# Altium PCB PCB.PcbDoc
Units mm, origin at the board's own origin, x right, y up, seen from the top; angles counter-clockwise.
Board outline 72.52 x 60.74 mm, 2 copper layers (Top Layer, Bottom Layer); 52 components, 46 nets, 260 pads, 31 vias.
Unrouted connection lines stored in the file: 1.
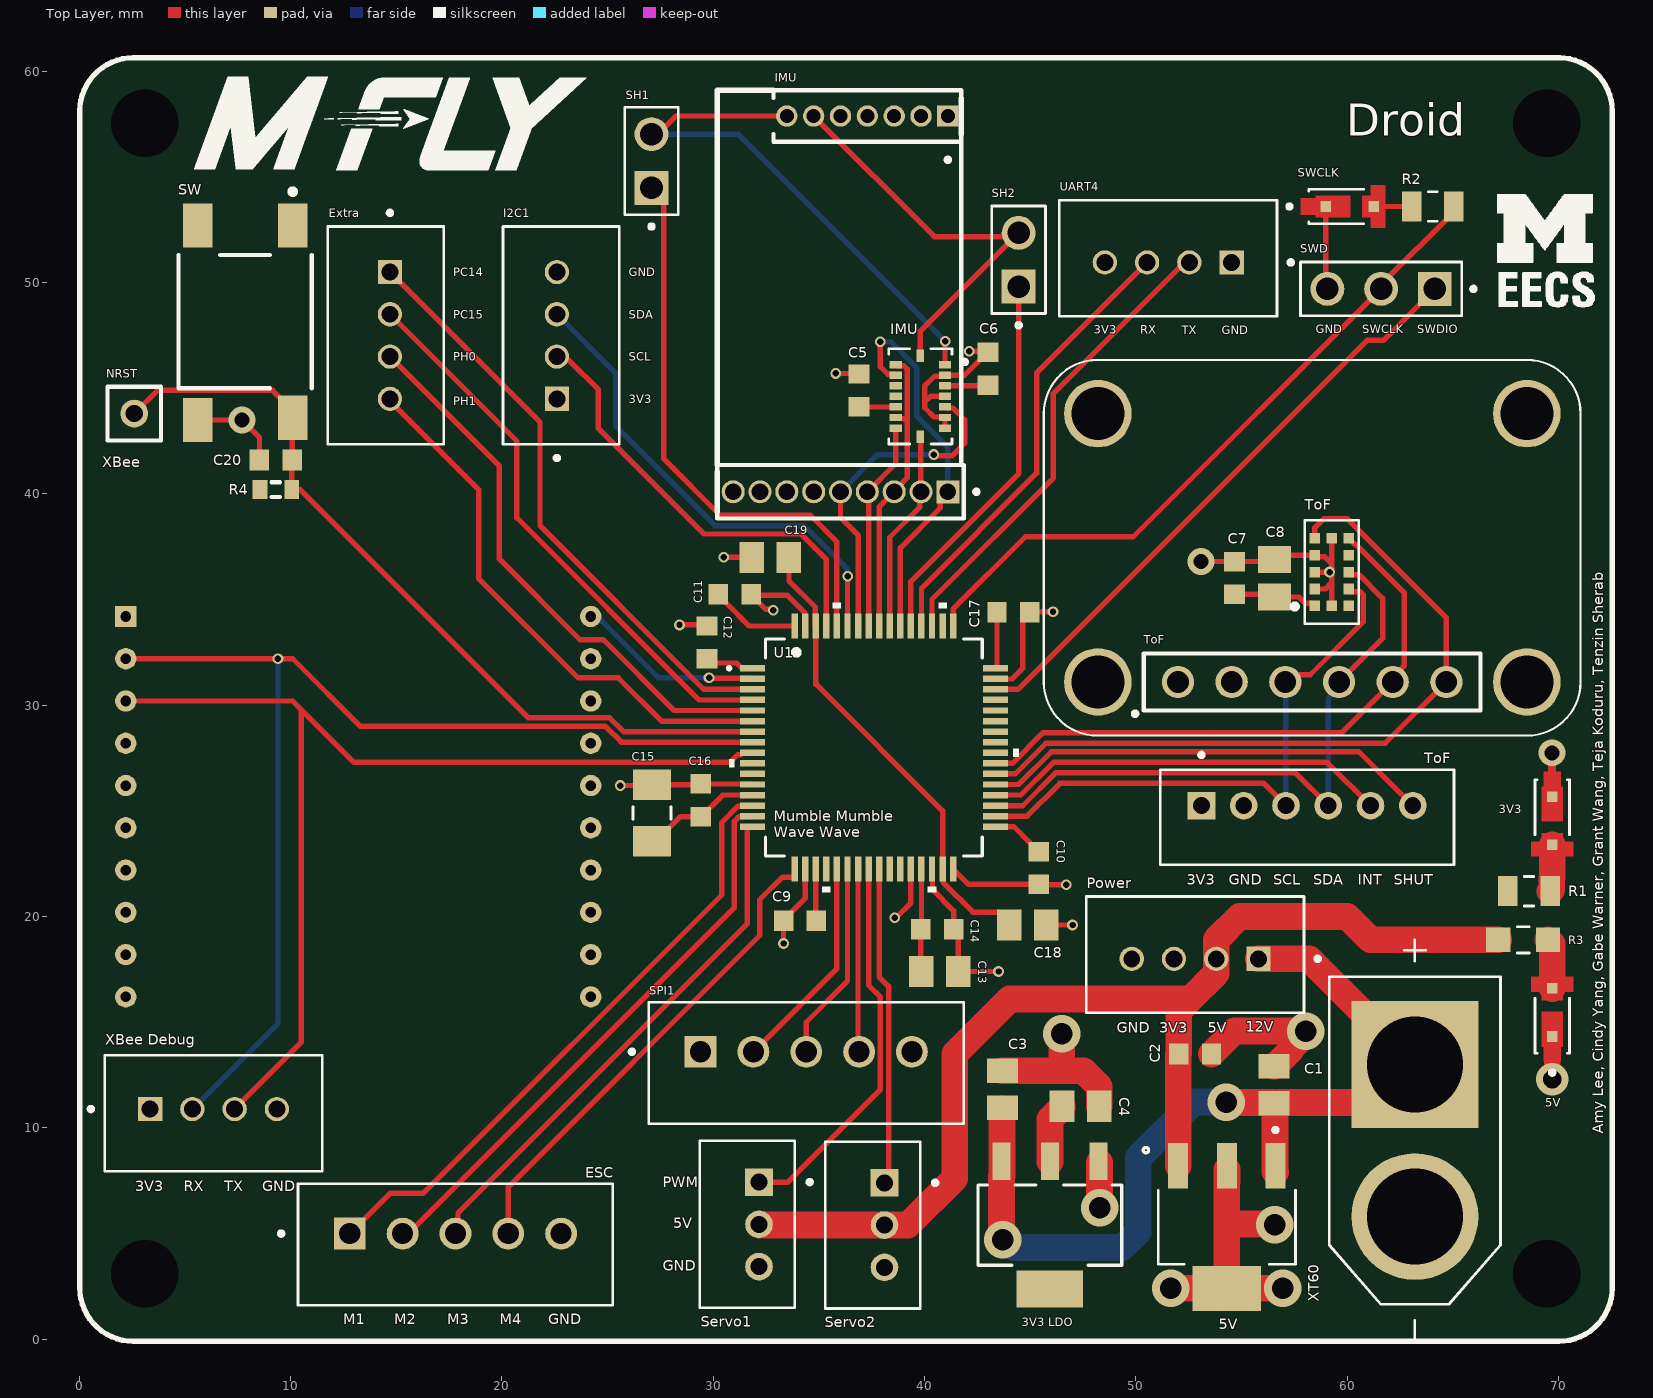
[diagram p0: Top Layer view]
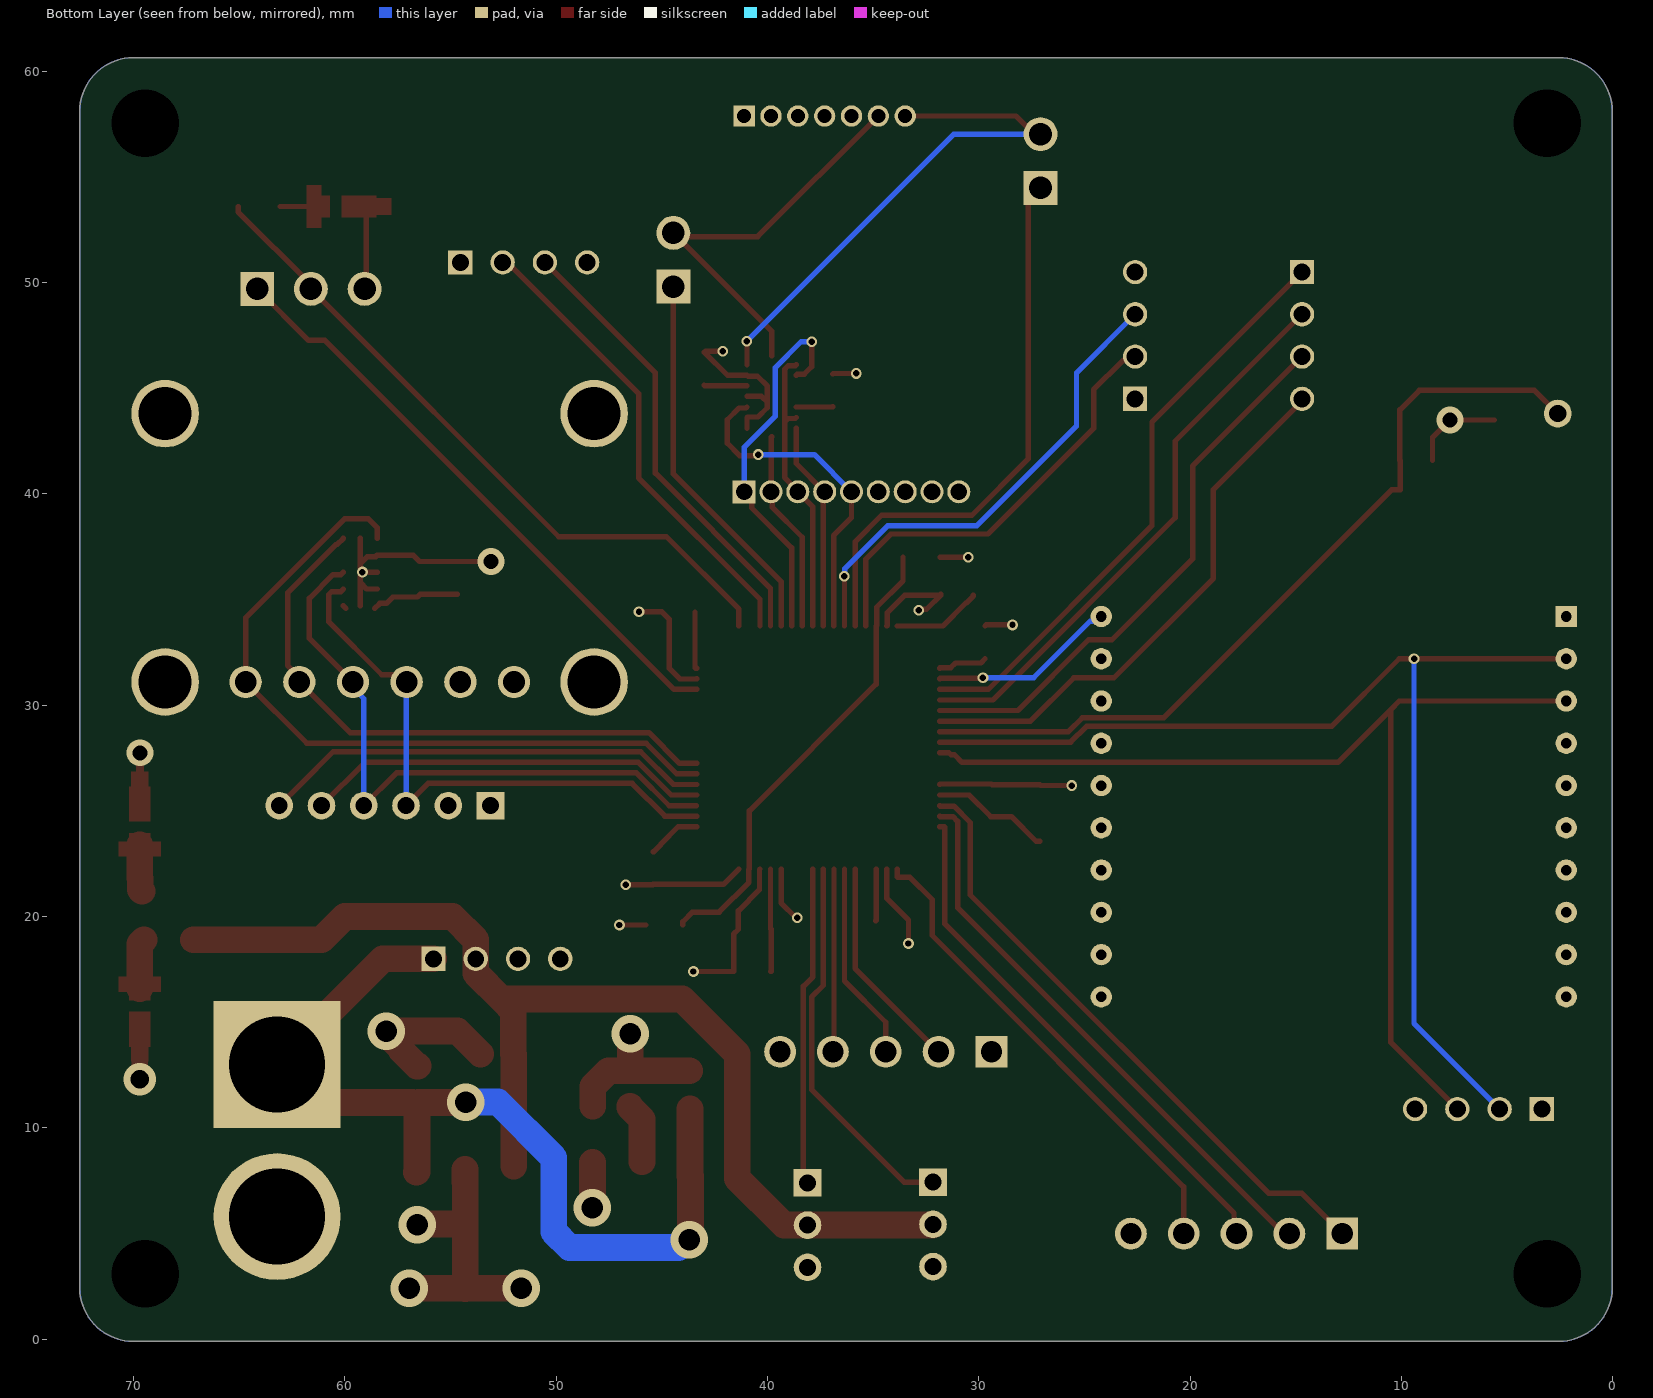
[diagram p1: Bottom Layer view, seen from below]
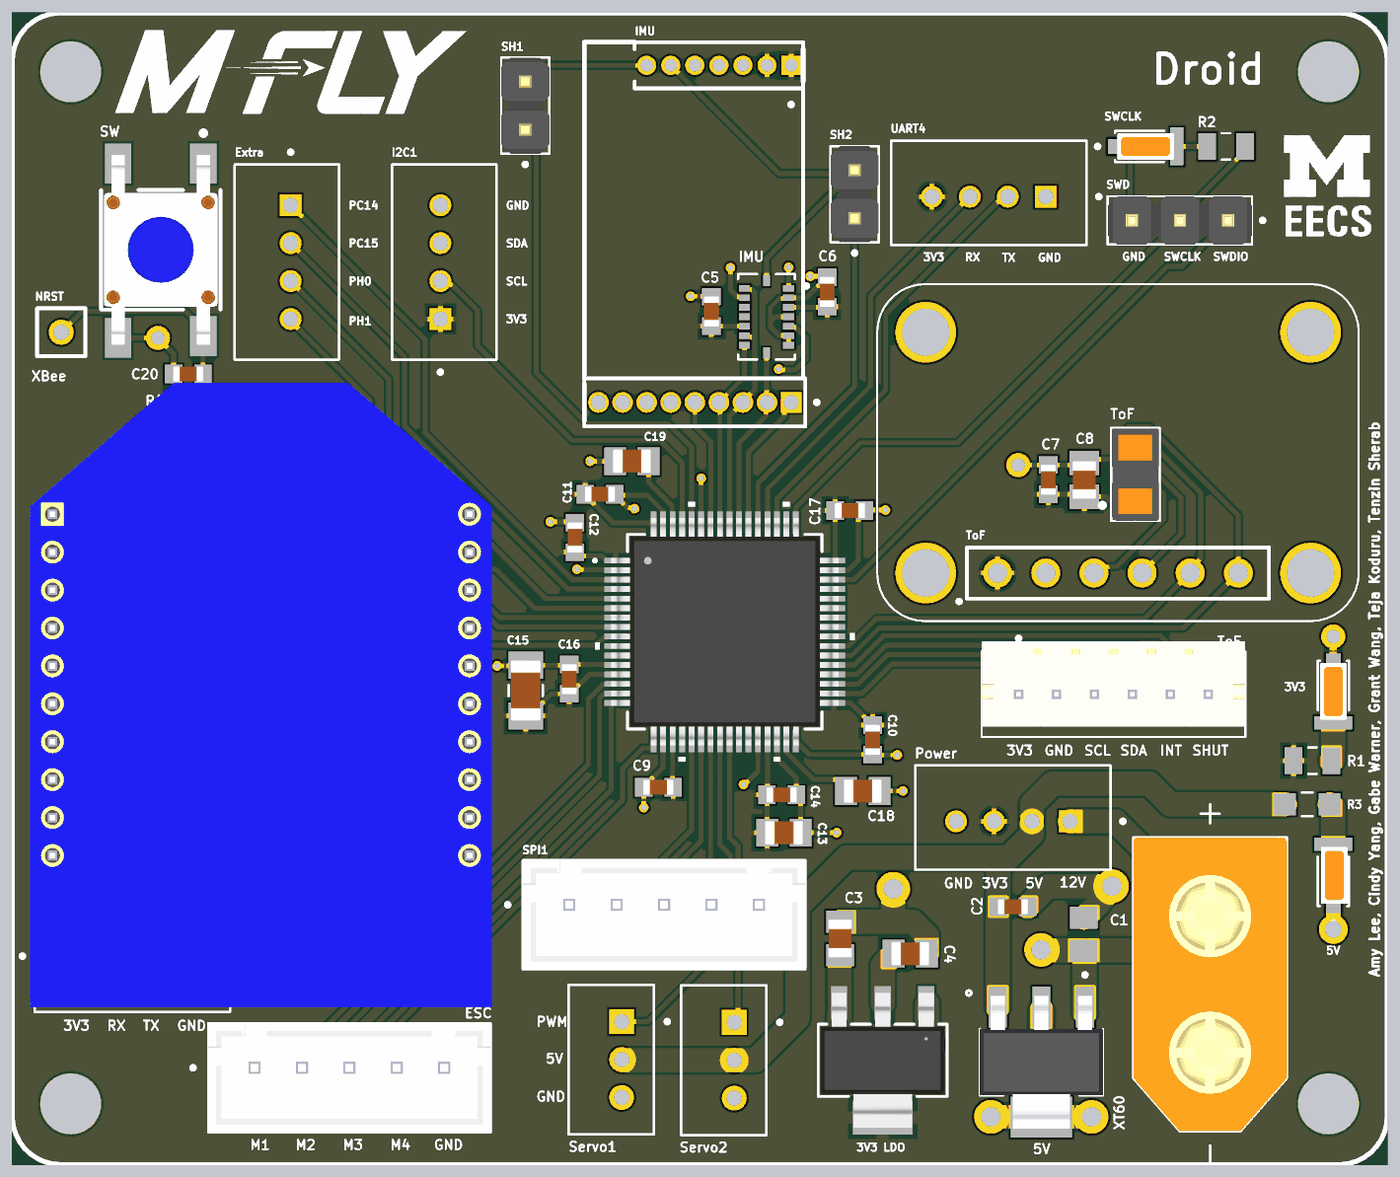
[diagram p2: 3D render of the assembled board from above, using the file's embedded part models]

## Layer stack, top to bottom
Top Solder: solder mask 0.0102, Solder Resist, Dk 3.5
Top Layer: signal copper 0.0356
Dielectric 1: dielectric 0.32, FR-4, Dk 4.8
Bottom Layer: signal copper 0.0356
Bottom Solder: solder mask 0.0102, Solder Resist, Dk 3.5

## Board outline
0.02,2.44 0.02,58.2 0.02,58.1 cw(c2.56,58.1) 2.56,60.64 70,60.64 cw(c70,58.1) 72.54,58.1 72.54,2.34 72.54,2.44 cw(c70,2.44) 70,-0.1 2.56,-0.1 cw(c2.56,2.44)

## Design rules (kind name [scope] priority, off if disabled: settings)
Clearance [All] p1: gap=0.127 ignorepadtopadclearanceinfootprint=FALSE
PolygonConnect PolygonConnect_2 [(InNet('3V3') AND InComponent('3V3 LDO'))] p1: connectstyle=Relief reliefconductorwidth=0.635 reliefentries=4 polygonreliefangle="90 Angle" airgapwidth=0.254
PolygonConnect [All] p2: connectstyle=Relief reliefconductorwidth=0.254 reliefentries=4 polygonreliefangle="90 Angle" airgapwidth=0.254
RoutingVias [All] p1: holewidth=0.711 width=1.27 viastyle="Through Hole" minholewidth=0.711 minwidth=1.27 maxholewidth=0.711 maxwidth=1.27
SolderMaskExpansion [All] p1: expansion=0.102 istentingtop=FALSE
SupplyNets "Schematic Supply Nets_4" [InNet('V11')] p1: voltage=0.000
SupplyNets "Schematic Supply Nets_3" [InNet('+5')] p2: voltage=0.000
SupplyNets "Schematic Supply Nets_2" [InNet('GND')] p3: voltage=0.000
SupplyNets "Schematic Supply Nets_1" [InNet('+12')] p4: voltage=0.000
SupplyNets "Schematic Supply Nets" [InNet('3V3')] p5: voltage=0.000
Width [All] p1: maxlimit=2.54 minlimit=0.254 preferedwidth=0.254 minimp=50.000000 maximp=50.000000 favimp=50.000000
30 further rules are at their usual default settings.

## Classes and differential pairs
component class STM32: 5V C1 C2 C3 C4 C9 C10 C11 C12 C13 C14 C15 C16 C17 C18 C19 C20 NRST R1 R2 R3 R4 SW SWCLK U1 XT60
component class Schematic: C5 C6 C7 C8 ESC Extra I2C1 IMU Power Servo1 Servo2 SPI1 ToF UART4 XBee "XBee Debug"

## Components (designator, comment, footprint, x,y, rotation, side; value= is the part's Value field where it differs from the comment)
3V3 "LED" LED_MP-3014-1100-50-70 69.7,24.85 r90 top (schematic designator D2)
"3V3 LDO" "LM1117MPX-33NOPB" SOT-223_DIO 45.928,5.397 r180 top (schematic designator U2)
5V "LED" LED_MP-3014-1100-50-70 69.7,15.15 r270 top (schematic designator D3)
5V "LM7805MP/NOPB" VREG_LM7805MP/NOPB 54.3,5.3 r270 top (schematic designator VR1)
C1 "220nF" CAPC2012X88N 56.533,12.046 r270 top
C2 "100nF" CAPC1608X90N 52.8,13.5 r180 top
C3 "10uF" CAPC2012X152N 43.681,11.824 r270 top
C4 "10uF" CAPC2012X152N 47.381,11.024 r180 top
C5 "100nF" CAPC1608X90N 36.9,44.9 r270 top
C6 "100nF" CAPC1608X90N 43,45.925 r270 top
C7 "100nF" CAPC1608X90N 54.663,36.025 r270 top
C8 "4.7uF" CAPC2012X145N 56.563,36.011 r270 top
C9 "100nF" CAPC1608X90N 34.1,19.8 r0 top
C10 "100nF" CAPC1608X90N 45.4,22.3 r90 top
C11 "100nF" CAPC1608X90N 31.013,35.255 r180 top
C12 "100nF" CAPC1608X90N 29.7,32.975 r270 top
C13 "10uF" CAPC2012X152N 40.72,17.4 r180 top
C14 "100nF" CAPC1608X90N 40.6,19.4 r180 top
C15 "1uF" CAPC3216X180N 27.1,24.9 r270 top
C16 "100nF" CAPC1608X90N 29.4,25.5 r270 top
C17 "100nF" CAPC1608X90N 44.2,34.4 r180 top
C18 "2.2uF" CAPC2012X152N 44.88,19.6 r180 top
C19 "2.2uF" CAPC2012X152N 32.7,37 r0 top
C20 "100nF" CAPC1608X90N 9.3,41.6 r0 top
ESC "B5B-XH-A" JST_B5B-XH-A 17.8,4.475 r180 top (schematic designator J1)
Extra "35362-0450" MOLEX_35362-0450 14.7,47.5 r270 top (schematic designator J13)
I2C1 "35362-0450" MOLEX_35362-0450 22.6,47.5 r90 top (schematic designator J11)
IMU "TMS-107-54-G-S" SAMTEC_TMS-107-54-G-S 37.29,57.88 r180 top (schematic designator J9)
IMU "BMI088" PQFN50P450X300X100-16N 39.8,44.615 r270 top (schematic designator U4)
J10 "SLM-109-01-T-S" SAMTEC_SLM-109-01-T-S 36.02,40.1 r180 top
NRST "TS-101-X-A-1" SAMTEC_TS-101-X-A-1 2.6,43.8 r0 top (schematic designator J15)
Power "35362-0450" MOLEX_35362-0450 52.8,18 r180 top (schematic designator J8)
R1 "91ohm" RESC2012X50N 68.6,21.2 r180 top
R2 "91ohm" RESC2012X50N 64.045,53.6 r0 top
R3 "430ohm" RES_ERJ-6GEYJ431V 68.325,18.9 r180 top
R4 "Res3" J1-0603 9.3,40.2 r0 top value=10K
Servo1 "B3B-PH-K-S" JST_B3B-PH-K-S 31.611,5.436 r90 top (schematic designator J2)
Servo2 "B3B-PH-K-S" JST_B3B-PH-K-S 37.55,5.4 r90 top (schematic designator J3)
SH1 "M20-9990245" HARWIN_M20-9990245 27.076,55.753 r90 top
SH2 "M20-9990245" HARWIN_M20-9990245 44.45,51.079 r90 top
SPI1 "B5B-XH-A" JST_B5B-XH-A 34.4,13.075 r180 top (schematic designator J12)
SW "" FP-2-1977223-2-MFG 7.85,48.15 r0 top
SWCLK "" LED_MP-3014-1100-50-70 59.8,53.6 r180 top (schematic designator D1)
SWD "M20-9990345" HARWIN_M20-9990345 61.6,49.7 r180 top (schematic designator J9)
ToF "" 61300611821 58.34,31.1 r0 top (schematic designator J?)
ToF "VL53L1CXV0FY/1" SENSOR_VL53L1CXV0FY/1 59.263,36.3 r180 top (schematic designator U6)
ToF "B6B-PH-K" JST_B6B-PH-K 58.1,24.7 r180 top (schematic designator J6)
U1 "STM32U545RET6Q" LQFP64-10x10mm_STM 37.6,28 r0 top
UART4 "35362-0450" MOLEX_35362-0450 51.527,50.952 r180 top (schematic designator J14)
XBee "XB24-Z7WIT-004" DIP-20 0.946,8.191 r0 top (schematic designator XBEE)
"XBee Debug" "35362-0450" MOLEX_35362-0450 6.351,10.892 r0 top (schematic designator J7)
XT60 "XT60-M" AMASS_XT60-M 63.2,9.4 r270 top (schematic designator J5)

## Footprints (in the part's own frame and the unit in brackets; to place one, negate y for a bottom-side part, rotate by r counter-clockwise, add the part's x,y. Pads: shape width x height; smd on the part's side, far side on the other; paste and mask are expansions set on the pad)
61300611821 [mm]
  round 1.53 hole 1.02: 1(-6.35,0) 2(-3.81,0) 3(-1.27,0) 4(1.27,0) 5(3.81,0) 6(6.35,0)
  silkscreen extent -8.48,-1.6 7.97,1.35
AMASS_XT60-M [mm]
  round 6 hole 4.55: N(3.6,0)
  rect 6x6 / inner round 6 / far side rect 6x6 hole 4.55: P(-3.6,0)
  silkscreen extent -9.5,-4.05 9.5,4.05, body extent -7.75,-4.05 7.75,4.05, height 16
CAPC1608X90N [mm]
  rect 0.92x0.98 smd: 1(-0.775,0) 2(0.775,0)
  body extent -0.8,-0.41 0.8,0.41, height 0.9
CAPC2012X88N [mm]
  rect 1.16x1.47 smd: 1(-0.875,0) 2(0.875,0)
CAPC2012X145N [mm]
  rect 1.28x1.56 smd: 1(-0.889,0) 2(0.889,0)
  body extent -1,-0.63 1,0.63, height 1.45
CAPC2012X152N [mm]
  rect 1.16x1.47 smd: 1(-0.88,0) 2(0.88,0)
  body extent -1,-0.63 1,0.63, height 1.52
CAPC3216X180N [mm]
  rect 1.44x1.82 smd: 1(-1.336,0) 2(1.336,0)
  silkscreen extent -0.29,-0.9 0.29,0.9, body extent -1.6,-0.8 1.6,0.8, height 1.8
DIP-20 [mm]
  rect 1.008x1.008 / inner round 1.008 / far side rect 1.008x1.008 hole 0.5: 1(1.254,26.009)
  round 1.008 hole 0.5: 2(1.254,24.009) 3(1.254,22.009) 4(1.254,20.009) 5(1.254,18.009) 6(1.254,16.009) 7(1.254,14.009) 8(1.254,12.009) 9(1.254,10.009) 10(1.254,8.009) 11(23.254,8.009) 12(23.254,10.009) 13(23.254,12.009) 14(23.254,14.009) 15(23.254,16.009) 16(23.254,18.009) 17(23.254,20.009) 18(23.254,22.009) 19(23.254,24.009) 20(23.254,26.009)
  body extent 0,0 24.38,32.94, height 4.6
FP-2-1977223-2-MFG [mm]
  rect 1.4x2.1 smd paste+0 mask+0: 1(2.25,4.55) 2(2.25,-4.55) 3(-2.25,4.55) 4(-2.25,-4.65)
  silkscreen extent -3.15,-3.15 3.15,6.27, body extent -3.25,-5.8 3.25,5.7, height 0.25
HARWIN_M20-9990245 [mm]
  rect 1.605x1.605 / inner round 1.605 / far side rect 1.605x1.605 hole 1.07: 1(-1.27,0)
  round 1.605 hole 1.07: 2(1.27,0)
  silkscreen extent -3.2,-1.27 2.54,1.27, body extent -2.54,-1.27 2.54,1.27, height 8.74
HARWIN_M20-9990345 [mm]
  rect 1.605x1.605 / inner round 1.605 / far side rect 1.605x1.605 hole 1.07: 1(-2.54,0)
  round 1.605 hole 1.07: 2(0,0) 3(2.54,0)
  silkscreen extent -4.47,-1.27 3.81,1.27, body extent -3.82,-1.27 3.8,1.27, height 7.37
J1-0603 [mm] "Chip Resistor, Body 1.6x0.8mm, IPC High Density"
  rect 0.7x0.9 smd: 1(-0.75,0) 2(0.75,0)
  silkscreen extent -0.2,-0.35 0.2,0.35, body extent -0.85,-0.48 0.85,0.48, height 0.9
JST_B3B-PH-K-S [mm]
  rect 1.308x1.308 / inner round 1.308 / far side rect 1.308x1.308 hole 0.8: 1(2,-0.55)
  round 1.308 hole 0.8: 2(0,-0.55) 3(-2,-0.55)
  silkscreen extent -3.95,-3.05 3.95,2.25
JST_B5B-XH-A [mm]
  rect 1.508x1.508 / inner round 1.508 / far side rect 1.508x1.508 hole 1: 1(5,-0.525)
  round 1.508 hole 1: 2(2.5,-0.525) 3(0,-0.525) 4(-2.5,-0.525) 5(-5,-0.525)
  silkscreen extent -7.45,-2.88 8.35,2.88, body extent -7.45,-2.88 7.45,2.88, height 7
JST_B6B-PH-K [mm]
  rect 1.308x1.308 / inner round 1.308 / far side rect 1.308x1.308 hole 0.8: 1(5,-0.55)
  round 1.308 hole 0.8: 2(3,-0.55) 3(1,-0.55) 4(-1,-0.55) 5(-3,-0.55) 6(-5,-0.55)
  silkscreen extent -6.95,-3.05 6.95,2.25, body extent -6.95,-2.8 6.95,1.7, height 6
LED_MP-3014-1100-50-70 [mm]
  rect 0.5x0.5 smd paste-1 mask+0: A(-1.45,0) C(0.825,0)
  Top Layer region: 1.3,0.4 2,0.4 2,-0.4 1.3,-0.4 1.3,-0.5 -0.35,-0.5 -0.35,0.5 1.3,0.5
  Top Layer region: -1.3,0.5 -0.9,0.5 -0.9,-0.5 -1.3,-0.5 -1.3,-1 -2,-1 -2,1 -1.3,1
  silkscreen extent -0.98,-0.82 1.62,0.82, body extent -1.5,-0.7 1.5,0.7, height 0.52
LQFP64-10x10mm_STM [mil]
  rect 47x12 smd paste+0 mask+0: 1(-226.38,147.64) 2(-226.38,127.95) 3(-226.38,108.27) 4(-226.38,88.58) 5(-226.38,68.9) 6(-226.38,49.21) 7(-226.38,29.53) 8(-226.38,9.84) 9(-226.38,-9.84) 10(-226.38,-29.53) 11(-226.38,-49.21) 12(-226.38,-68.9) 13(-226.38,-88.58) 14(-226.38,-108.27) 15(-226.38,-127.95) 16(-226.38,-147.64) 33(226.38,-147.64) 34(226.38,-127.95) 35(226.38,-108.27) 36(226.38,-88.58) 37(226.38,-68.9) 38(226.38,-49.21) 39(226.38,-29.53) 40(226.38,-9.84) 41(226.38,9.84) 42(226.38,29.53) 43(226.38,49.21) 44(226.38,68.9) 45(226.38,88.58) 46(226.38,108.27) 47(226.38,127.95) 48(226.38,147.64)
  rect 12x47 smd paste+0 mask+0: 17(-147.64,-226.38) 18(-127.95,-226.38) 19(-108.27,-226.38) 20(-88.58,-226.38) 21(-68.9,-226.38) 22(-49.21,-226.38) 23(-29.53,-226.38) 24(-9.84,-226.38) 25(9.84,-226.38) 26(29.53,-226.38) 27(49.21,-226.38) 28(68.9,-226.38) 29(88.58,-226.38) 30(108.27,-226.38) 31(127.95,-226.38) 32(147.64,-226.38) 49(147.64,226.38) 50(127.95,226.38) 51(108.27,226.38) 52(88.58,226.38) 53(68.9,226.38) 54(49.21,226.38) 55(29.53,226.38) 56(9.84,226.38) 57(-9.84,226.38) 58(-29.53,226.38) 59(-49.21,226.38) 60(-68.9,226.38) 61(-88.58,226.38) 62(-108.27,226.38) 63(-127.95,226.38) 64(-147.64,226.38)
  silkscreen extent -273,-270 270,270, body extent -236,-236 236,236, height 63
MOLEX_35362-0450 [mm]
  rect 1.15x1.15 / inner round 1.15 / far side rect 1.15x1.15 hole 0.8: 01(-3,0)
  round 1.15 hole 0.8: 02(-1,0) 03(1,0) 04(3,0)
  silkscreen extent -5.9,-2.95 5.15,2.55
PQFN50P450X300X100-16N [mm]
  rect 0.35x0.59 smd: 1(-1.5,1.165) 2(-1,1.165) 3(-0.5,1.165) 4(0,1.165) 5(0.5,1.165) 6(1,1.165) 7(1.5,1.165) 9(1.5,-1.165) 10(1,-1.165) 11(0.5,-1.165) 12(0,-1.165) 13(-0.5,-1.165) 14(-1,-1.165) 15(-1.5,-1.165)
  rect 0.59x0.35 smd: 8(1.915,0) 16(-1.915,0)
  silkscreen extent -2.25,-1.5 2.25,2.2
RES_ERJ-6GEYJ431V [mm]
  rect 1.15x1.15 smd: 1(-1.175,0) 2(1.175,0)
  silkscreen extent -0.28,-0.63 0.28,0.63
RESC2012X50N [mm]
  rect 0.92x1.42 smd: 1(-1,0) 2(1,0)
  silkscreen extent -0.22,-0.7 0.22,0.7
SAMTEC_SLM-109-01-T-S [mm]
  rect 1.087x1.087 hole 0.787: 01(-5.08,0)
  round 1.087 hole 0.787: 02(-3.81,0) 03(-2.54,0) 04(-1.27,0) 05(0,0) 06(1.27,0) 07(2.54,0) 08(3.81,0) 09(5.08,0)
  silkscreen extent -6.53,-1.27 5.83,1.27
SAMTEC_TMS-107-54-G-S [mm]
  rect 1.01x1.01 hole 0.66: 01(-3.81,0)
  round 1.01 hole 0.66: 02(-2.54,0) 03(-1.27,0) 04(0,0) 05(1.27,0) 06(2.54,0) 07(3.81,0)
  silkscreen extent -4.44,-1.22 4.44,2.17
SAMTEC_TS-101-X-A-1 [mil]
  round 52 hole 32: 01(0,0)
  silkscreen extent -50,-50 50,50
SENSOR_VL53L1CXV0FY/1 [mm]
  rect 0.5x0.5 smd: 1(0.8,1.6) 2(0.8,0.8) 3(0.8,0) 4(0.8,-0.8) 5(0.8,-1.6) 6(0,-1.6) 7(-0.8,-1.6) 8(-0.8,-0.8) 9(-0.8,0) 10(-0.8,0.8) 11(-0.8,1.6) 12(0,1.6)
  silkscreen extent -1.28,-2.45 1.87,2.45, body extent -1.25,-2.45 1.25,2.45, height 1.6
SOT-223_DIO [mm]
  rect 0.851x1.761 smd paste+0 mask+0: 1(-2.3,-3.025) 2(0,-3.025) 3(2.3,-3.025)
  rect 3.151x1.761 smd paste+0 mask+0: 4(0,3.025)
  silkscreen extent -4.67,-3.68 3.4,1.9, body extent -3.27,-3.55 3.27,3.55, height 1.65
VREG_LM7805MP/NOPB [mm]
  rect 2.15x0.95 smd: 1(-2.9,2.3) 2(-2.9,0) 3(-2.9,-2.3)
  rect 2.15x3.25 smd: 4(2.9,0)
  silkscreen extent -4.7,-3.25 1.75,3.25, body extent -3.5,-3.25 3.5,3.25, height 1.8

## Part data
3V3 5V SWCLK: library part MP-3014-1100-50-70, "LED Midpower Lighting series 3014 White,Cool, 5000K, 70 CRI, 34lm 2.85V 150mA 110Â°", Package="NON-STANDARD-2 Luminus Devices Inc.", Availability="In Stock", Check_prices=https://www.snapeda.com/parts/MP-3014-1100-50-70/Luminus+Devices+Inc./view-part/?ref=eda, MF="Luminus Devices Inc.", MP=MP-3014-1100-50-70, Price=None, Purchase-URL=https://pricing.snapeda.com/search/part/MP-3014-1100-50-70/?ref=eda, SnapEDA_Link=https://www.snapeda.com/parts/MP-3014-1100-50-70/Luminus+Devices+Inc./view-part/?ref=snap
"3V3 LDO": library part AP2114H-3.3TRG1, "Description", Manufacturer_Name="Diodes Inc", Copyright="Copyright (C) 2025 Ultra Librarian. All rights reserved.", Manufacturer_Part_Number=AP2114H-3.3TRG1, RefDes=RefDes, Type=Type
5V: "1.5-A, 30-V, linear voltage regulator", Package="SOT-223-4 Texas Instruments", Check_prices=https://www.snapeda.com/parts/LM7805MP/NOPB/Texas+Instruments/view-part/?ref=eda, MF="Texas Instruments", MP=LM7805MP/NOPB, SnapEDA_Link=https://www.snapeda.com/parts/LM7805MP/NOPB/Texas+Instruments/view-part/?ref=snap
C1: library part C0805C224J4RACTU, ".22UF 16V 5% 080", Package=None, Availability=Unavailable, MP=C0805C224J4RACTU, Price=None
C2 C5 C6 C7 C9 C10 C11 C12 C14 C16 C17 C20: library part 06035C104K4T2A, "Capacitor MLCC 0603 100nF 50V", Package="1608 AVX", Check_prices=https://www.snapeda.com/parts/06035C104K4T2A/AVX/view-part/?ref=eda, MF=AVX, MP=06035C104K4T2A, SnapEDA_Link=https://www.snapeda.com/parts/06035C104K4T2A/AVX/view-part/?ref=snap
C3 C4 C13: library part 0805ZC106KAT4A, "10 ÂµF Â±10% 10V Ceramic Capacitor X7R 0805 (2012 Metric)", Package="2012 AVX", Check_prices=https://www.snapeda.com/parts/0805ZC106KAT4A/AVX/view-part/?ref=eda, MF="AVX / Kyocera", MP=0805ZC106KAT4A, SnapEDA_Link=https://www.snapeda.com/parts/0805ZC106KAT4A/AVX/view-part/?ref=snap
C8: library part C0805X475J8RACAUTO, "4.7 ÂµF Â±5% 10V Ceramic Capacitor X7R 0805 (2012 Metric)", Package="2012 KEMET", Check_prices=https://www.snapeda.com/parts/C0805X475J8RACAUTO/KEMET/view-part/?ref=eda, MF=KEMET, MP=C0805X475J8RACAUTO, SnapEDA_Link=https://www.snapeda.com/parts/C0805X475J8RACAUTO/KEMET/view-part/?ref=snap
C15: library part CGA5L3X8R1H105K160AB, "1 ÂµF Â±10% 50V Ceramic Capacitor X8R 1206 (3216 Metric)", Package="3216 TDK", Check_prices=https://www.snapeda.com/parts/CGA5L3X8R1H105K160AB/TDK/view-part/?ref=eda, Digi-Key_Part_Number=445-13000-2-ND, MF=TDK, MP=CGA5L3X8R1H105K160AB, Purchase-URL=https://pricing.snapeda.com/search/part/CGA5L3X8R1H105K160AB/?ref=eda, SnapEDA_Link=https://www.snapeda.com/parts/CGA5L3X8R1H105K160AB/TDK/view-part/?ref=snap
C18 C19: library part 08055C225KAT2A, "2.2 ÂµF Â±10% 50V Ceramic Capacitor X7R 0805 (2012 Metric)", Package="2012 AVX", Check_prices=https://www.snapeda.com/parts/08055C225KAT2A/AVX/view-part/?ref=eda, MF=AVX, MP=08055C225KAT2A, SnapEDA_Link=https://www.snapeda.com/parts/08055C225KAT2A/AVX/view-part/?ref=snap
ESC SPI1: "Connector Header Through Hole 5 position 0.098 (2.50mm)", Package=None, Check_prices=https://www.snapeda.com/parts/B5B-XH-A/JST+Sales+America+Inc./view-part/?ref=eda, MF="JST Sales", MP=B5B-XH-A, SnapEDA_Link=https://www.snapeda.com/parts/B5B-XH-A/JST+Sales+America+Inc./view-part/?ref=snap
Extra I2C1 Power UART4 "XBee Debug": "<a href=\"https://pricing.snapeda.com/parts/35362-0450/Molex/view-part?ref=eda\">Check availability</a>", Package=None, Availability=Unavailable, MF="{'manufacturer': u'Molex'}", MP=35362-0450, Price=None
IMU J10 Servo1 Servo2 SH1 SH2: Package=None, Availability=Unavailable, Price=None
  IMU: MP=TMS-107-54-G-S
  J10: MP=SLM-109-01-T-S
  Servo1 Servo2: MF="{'manufacturer': u'JST Sales America Inc.'}", MP=B3B-PH-K-S
  SH1 SH2: MF=Harwin, MP=M20-9990245
IMU: "High-performance 6-axis inertial sensor (accelerometer + gyroscope) <a href=\"https://pricing.snapeda.com/parts/BMI088/Bosch%20Sensortec/view-part?ref=eda\">Check prices</a>", Package=None, Availability=Unavailable, MP=BMI088, Price=None
NRST: "1 Position Header Connector Male Pin Gold", Package=None, Check_prices=https://www.snapeda.com/parts/TS-101-G-A-1/Samtec+Inc./view-part/?ref=eda, MF="Samtec Inc.", MP=TS-101-G-A-1, SnapEDA_Link=https://www.snapeda.com/parts/TS-101-G-A-1/Samtec+Inc./view-part/?ref=snap
R1 R2: library part CRCW080591R0FKEA, "Surface Mount Thick Film Resistor, AEC-Q200 CRCW Series, 91 ohm, 125 mW, - 1%, 150 V", Package=None, Availability=Unavailable, MP=CRCW080591R0FKEA, Price=None
R3: library part ERJ-6GEYJ431V, Package=None, Availability=Unavailable, MF="{'manufacturer': u'Panasonic Electronic Components'}", MP=ERJ-6GEYJ431V, Price=None
R4: "Resistor", LatestRevisionDate=29-May-2009, LatestRevisionNote="IPC-7351 Footprint Added.", PackageDescription="Chip Resistor", PackageReference=J1-0603, Published=8-Jun-2000, Publisher="Altium Limited"
SW: library part CMP-03407-000026-1, "SWITCH TACTILE SPST-NO 0.05A 24V", RoHS Compliant=Yes
SWD: "2.54mm (0.1) Pitch SIL Vertical Throughboard Pin Header, 6.1mm mating pin height, gold (hi-temp mould), 3 contacts", Package=None, Check_prices=https://www.snapeda.com/parts/M20-9990345/Harwin+Inc./view-part/?ref=eda, MF=Harwin, MP=M20-9990345, SnapEDA_Link=https://www.snapeda.com/parts/M20-9990345/Harwin+Inc./view-part/?ref=snap
ToF: library part 6130XX11821_61300611821, Package=None, Availability=Unavailable, MF="{'manufacturer': u'W\xfcrth Elektronik'}", MP=61300611821, Price=None
ToF: "Optical Sensor 157.480 (4m) IÂ²C Output", Package="LGA-12 STMicroelectronics", Availability="In Stock", Check_prices=https://www.snapeda.com/parts/VL53L1CXV0FY/1/STMicroelectronics/view-part/?ref=eda, MF=STMicroelectronics, MP=VL53L1CXV0FY/1, Price=None, Purchase-URL=https://pricing.snapeda.com/search/part/VL53L1CXV0FY/1/?ref=eda, SnapEDA_Link=https://www.snapeda.com/parts/VL53L1CXV0FY/1/STMicroelectronics/view-part/?ref=snap
ToF: "Conn Shrouded Header (4 Sides) HDR 6 POS 2mm Solder ST Top Entry Thru-Hole Box", Package=None, Check_prices=https://www.snapeda.com/parts/B6B-PH-K/JST/view-part/?ref=eda, MF="JST Corporation", MP=B6B-PH-K, SnapEDA_Link=https://www.snapeda.com/parts/B6B-PH-K/JST/view-part/?ref=snap
U1: "Ultra-low-power with FPU Arm Cortex-M33 MCU with TrustZone, 160 MHz with 512 Kbytes of Flash memory", Manufacturer_Name=STMicroelectronics, Copyright="Copyright (C) 2025 Ultra Librarian. All rights reserved.", Manufacturer_Part_Number=STM32U545RET6Q, RefDes=RefDes, Type=Type
XBee: "Xbee Zb (Zigbee Pro Feature Set), 1mw, Wire Antenna, 250000", Package=None, Availability=Unavailable, MP=XB24-Z7WIT-004, Price=None
XT60: "Plug; DC supply; XT60; male; PIN: 2; for cable; soldered; 30A; 500V", Package=Package, Check_prices=https://www.snapeda.com/parts/XT60-M/AMASS/view-part/?ref=eda, MF=AMASS, MP=XT60-M, SnapEDA_Link=https://www.snapeda.com/parts/XT60-M/AMASS/view-part/?ref=snap

## Free pads (board coordinates)
  round 1.524 hole 3.2: 2(3.1,57.54) 3(69.44,57.54) 4(3.1,3.1) 5(69.44,3.1)
  round 3.2 hole 2.5: 6(48.2,31.1) 6(48.2,43.8) 6(68.5,31.1) 6(68.5,43.8)

## Via types
v1: diameter 0.508, hole 0.305, Top Layer to Bottom Layer, 19 vias
v2: diameter 1.778, hole 1.016, Top Layer to Bottom Layer, 8 vias
v3: diameter 1.27, hole 0.711, Top Layer to Bottom Layer, 3 vias
v4: diameter 1.524, hole 0.889, Top Layer to Bottom Layer, 1 vias

## Nets (pads, with @x,y where several pads share a name; then routed paths per layer and width w, separated by ;. In a path a pad name is that pad's centre, name@x,y a point inside that pad or via, vN(x,y) a via of type N, cw(c..) or ccw(c..) an arc to the next point about the centre after c; other vN are vias at no path point)
3V3: "3V3 LDO.2" "3V3 LDO.4" "XBee Debug.01" C4.2 C5.2 C6.2 C7.2 C8.2 C9.2 C10.2 C11.2 C12.2 C13.2 C14.2 C15.2 C16.2 C17.2 I2C1.01 IMU.01 IMU.02 IMU.3 IMU.11 Power.03 R1.2 R4.1 SPI1.1 ToF.1 ToF.11 U1.1 U1.13 U1.19 U1.29 U1.33 U1.48 U1.64 UART4.04 XBee.1 | length 35.8
  Top Layer w0.254: C15.2 27.29,23.564 28.451,24.725 C16.2 ; C16.2@29.43,24.725 30.455,25.75 30.697,25.75 U1.13 ; C12.2 29.9,32 31.1,32 31.325,31.775 31.825,31.775 U1.1 ; C11.2@30.25,35.2 30.25,35.17 30.583,34.837 30.613,34.837 31.7,33.75 U1.64 ; U1.19 34.85,19.825 C9.2 ; C5.2 36.91,44.115 IMU.11 ; C13.2 39.825,17.415 C14.2 39.85,19.425 U1.29 ; IMU.3 42.965,45.115 C6.2 ; U1.33 44.225,24.25 45.037,23.438 45.037,23.408 45.37,23.075 C10.2 ; U1.48 43.4,31.75 43.425,31.775 C17.2 ; C7.2 56.435,35.25 C8.2 57.724,35.122 58.023,34.823 58.34,34.823 ToF.1@58.586,34.577 ; ToF.11@59.94,34.577 ToF.11
  Top Layer w1.27: 45.931,8.399 45.931,10.409 46.501,10.979 C4.2
+5: 5V.3 C2.2 Power.02 R3.2 Servo1.2 Servo2.2 | length 53.9
  Top Layer w1.27: Servo1.2@32.197,5.4 39.22,5.4 41.427,7.607 41.427,13.492 44.031,16.096 52.025,16.096 52.568,16.096 52.573,16.091 ; 5V.3 C2.2@52,13.475 ; C2.2 52.025,15.543 52.573,16.091 ; Power.02 53.8,17.318 52.573,16.091 ; Power.02@53.803,18.003 53.803,18.903 54.9,20 60,20 61.1,18.9 R3.2
+12: 5V.1 "3V3 LDO.3" C1.2 C3.2 Power.01 XT60.P | length 43.8
  Top Layer w1.27: v2@43.631,4.781 43.631,7.729 ; 43.655,7.729 C3.2@43.655,10.889 ; v2(54.281,11.219) 54.305,11.195 56.509,11.195 C1.2 ; Power.01 58.2,18 XT60.P 61.395,11.195 C1.2@56.793,11.195 ; C1.2@56.575,11.1 56.575,7.925 5V.1@56.6,7.9
  Bottom Layer w1.27: v2(43.7,4.712) 43.837,4.712 44.206,4.343 49.364,4.343 50.108,5.087 50.108,8.586 52.741,11.219 v2(54.281,11.219)
CSB_ACCEL: IMU.14 J10.01 U1.54 | length 18.1
  Top Layer w0.254: v1(37.9,47.2) 37.9,46.021 38.258,45.663 38.587,45.663 IMU.14 ; U1.54 38.85,37.45 40.741,39.341 40.741,39.741 J10.01
  Bottom Layer w0.254: v1(37.9,47.2) 38.4,47.2 39.635,45.965 39.635,43.665 41.1,42.2 J10.01
CSB_GYRO: IMU.5 J10.05 U1.58 | length 15.9
  Top Layer w0.254: J10.05 36.02,38.88 36.866,38.034 36.866,33.766 U1.58 ; v1(40.437,41.859) 40.485,41.811 41.311,41.811 41.9,42.4 41.9,43.509 41.342,44.067 41.013,44.067 IMU.5
  Bottom Layer w0.254: J10.05 37.779,41.859 v1(40.437,41.859)
GND: 3V3.C 5V.2 5V.4 5V.C "3V3 LDO.1" "XBee Debug.04" C1.1 C2.1 C3.1 C4.1 C5.1 C6.1 C7.1 C8.1 C9.1 C10.1 C11.1 C12.1 C13.1 C14.1 C15.1 C16.1 C17.1 C18.1 C19.1 C20.1 ESC.5 I2C1.04 IMU.2 IMU.03 IMU.4 IMU.6 IMU.7 J10.06 J10.09 Power.04 Servo1.3 Servo2.3 SPI1.5 SW.4 SWCLK.C SWD.3 ToF.2 ToF.3@58.463,36.3 ToF.4@58.463,37.1 ToF.6@59.263,37.9 ToF.12 U1.12 U1.18 U1.28 U1.30 U1.32 U1.47 U1.63 UART4.01 XBee.10 XT60.N | length 103.6
  Top Layer w0.254: SW.4 v3(7.7,43.5) 8.525,42.675 C20.1 ; v1(25.6,26.2) 27.064,26.2 C15.1 29.361,26.236 C16.1 31.825,26.275 U1.12 ; v1(28.4,33.8) 29.65,33.8 C12.1 ; v1(30.5,37) C19.1 ; C11.1 31.788,35.225 32.472,34.542 32.794,34.542 v1(32.842,34.493) ; C11.1@31.8,35.2 33.509,35.2 34.325,34.384 34.325,33.775 U1.63 ; v1(33.325,18.725) C9.1 ; C9.1@33.325,19.83 34.35,20.855 U1.18 ; v1(35.8,45.7) 36.875,45.7 C5.1 ; v1(38.585,19.945) 38.645,19.945 39.35,20.65 U1.28 ; 40,44.338 40,45.1 40.467,45.567 40.917,45.567 IMU.2 41.885,45.615 C6.1@42.97,46.7 ; U1.30 40.375,22.225 40.375,21.272 41.375,20.272 C14.1 41.6,19.175 C13.1 v1(43.5,17.4) ; IMU.7 IMU.6 40.942,43.638 40.445,43.638 40.007,44.076 40.007,44.338 40.285,44.615 IMU.4 ; U1.32 42.075,21.525 C10.1 45.425,21.5 v1(46.7,21.5) ; v1(42.106,46.75) 42.92,46.75 C6.1@42.97,46.7 ; C6.1 C6.1@42.97,46.7 ; U1.47 43.36,31.24 44.14,31.24 44.642,31.742 44.642,34.067 45.001,34.426 v1(46.074,34.426) ; C18.1 v1(47,19.6) ; 48.228,8.422 48.281,8.369 ; v3@53.326,36.788 53.338,36.8 C7.1 56.463,36.8 C8.1 56.763,37.1 58.463,37.1 58.528,37.035 58.928,37.035 59.263,36.7 ; 5V.4@54.287,2.413 5V.4 5V.4@54.313,2.413 ; ToF.2@58.463,35.5 58.963,35.5 59.263,35.8 ; ToF.3@58.463,36.3 v1(59.163,36.3) ; SWCLK.C 58.975,49.785 SWD.3 ; ToF.12 59.263,35.8 ; ToF.6@59.263,37.9 59.263,36.7 ; v3(69.694,27.75) v3@69.697,27.747 ; 3V3.C@69.697,25.678 3V3.C ; v1(59.163,36.3) 59.163,36.231 59.263,36.131 59.263,35.8 ; v1(59.163,36.3) 59.163,36.369 59.263,36.469 59.263,36.7
  Top Layer w0.381: 3V3.C@69.697,25.678 v3@69.697,27.747
  Top Layer w0.762: v4(69.7,12.3) 5V.C
  Top Layer w1.27: C3.1 46.489,12.704 ; v2(46.489,14.445) 46.489,12.704 ; C4.1 48.261,11.96 47.517,12.704 46.489,12.704 ; v2(48.281,6.224) 48.281,8.369 ; v2(51.638,2.413) 5V.4@54.287,2.413 ; C2.1 54.657,14.582 v2(58.027,14.582) 58.027,14.445 57.315,13.732 57.315,13.658 56.578,12.921 C1.1 ; 5V.4 54.3,5.456 ; 5V.2@54.3,7.9 54.3,5.456 ; 5V.2@54.31,7.434 5V.2@54.31,8.034 ; 5V.4@54.313,2.413 v2(56.947,2.413) ; v2(56.567,5.411) 56.522,5.456 54.3,5.456
  other v3: 53.078,36.795
I2C1_SCL: I2C1.02 U1.61 | length 21
  Top Layer w0.254: I2C1.02 22.771,46.329 23.147,46.329 23.2,46.275 23.219,46.275 24.562,44.933 24.562,43.104 29.566,38.1 34.154,38.1 35.35,36.904 U1.61
I2C1_SDA: I2C1.03 U1.59 | length 22.9
  Top Layer w0.254: U1.59 36.354,33.754 36.354,36.096 v1(36.358,36.1)
  Bottom Layer w0.254: I2C1.03 25.375,45.725 25.375,43.205 30.08,38.5 34.3,38.5 36.334,36.466 36.334,36.124 v1(36.358,36.1)
I2C2_SCL: ToF.3@57.1,25.25 ToF.3@57.07,31.1 ToF.10 U1.34 | length 27.7
  Top Layer w0.254: U1.34 44.85,24.75 46.4,26.3 56.05,26.3 ToF.3@57.1,25.25 ; ToF.3@57.07,31.1 57.415,31.1 57.757,31.441 58.248,31.441 60.763,33.956 60.763,35.228 60.614,35.377 60.186,35.377 ToF.10
  Bottom Layer w0.254: ToF.3@57.07,31.1 57.085,31.085 57.085,25.265 ToF.3@57.1,25.25
I2C2_SDA: ToF.4@59.1,25.25 ToF.4@59.61,31.1 ToF.9 U1.35 | length 30
  Top Layer w0.254: U1.35@43.357,25.243 44.643,25.243 46.2,26.8 57.55,26.8 ToF.4@59.1,25.25 ; ToF.4@59.61,31.1 61.671,33.161 61.671,35.059 60.553,36.177 60.186,36.177 ToF.9
  Bottom Layer w0.254: ToF.4@59.1,25.25 59.1,30.313 59.61,30.823 ToF.4@59.61,31.1
INT1: IMU.06 IMU.16 SH2.2 | length 19.4
  Top Layer w0.254: IMU.06 40.458,52.172 SH2.2@43.993,52.172 ; IMU.16 39.8,47.699 SH2.2
INT2: IMU.1 IMU.07 SH1.2 | length 25.8
  Top Layer w0.254: SH1.2 27.381,57.023 28.238,57.88 IMU.07 ; IMU.1 v1@40.965,47.224
  Bottom Layer w0.254: SH1.2 31.176,57.023 v1(40.973,47.225)
LPUART1_RX: "XBee Debug.02" U1.8 XBee.2 | length 54.4
  Top Layer w0.254: XBee.2 v1(9.4,32.2) 10.1,32.2 13.3,29 24.9,29 25.65,28.25 U1.8
  Bottom Layer w0.254: 5.26,10.797 9.4,14.937 v1(9.4,32.2)
LPUART1_TX: "XBee Debug.03" U1.9 XBee.3 | length 51.3
  Top Layer w0.254: XBee.3 10.1,30.2 10.5,29.8 ; 7.351,10.892 10.5,14.041 10.5,29.8 ; U1.9 31.405,27.75 31.312,27.656 31.148,27.656 30.791,27.3 13,27.3 10.5,29.8
Motor1: ESC.1 U1.14 | length 29.4
  Top Layer w0.254: ESC.1 14.7,6.9 16.273,6.9 30.4,21.027 30.4,24.447 31.177,25.225 31.825,25.225 U1.14
Motor2: ESC.2 U1.15 | length 27.1
  Top Layer w0.254: ESC.2 15.579,5 30.999,20.42 30.999,24.508 31.216,24.725 31.825,24.725 U1.15
Motor3: ESC.3 U1.16 | length 25.2
  Top Layer w0.254: ESC.3 17.922,5.122 17.922,5.976 31.6,19.654 31.6,24.225 31.625,24.25 U1.16
Motor4: ESC.4 U1.17 | length 23.2
  Top Layer w0.254: ESC.4 20.3,7.207 32.2,19.107 32.2,20.8 33.265,21.865 33.825,21.865 33.85,21.891 U1.17
NetD1_A: R2.1 SWCLK.A | length 1.8
  Top Layer w0.254: SWCLK.A R2.1
NetD2_A: 3V3.A R1.1 | length 2.2
  Top Layer w1.27: R1.1 69.675,21.275 69.675,21.794 69.7,21.819 3V3.A
NetD3_A: 5V.A R3.1 | length 2.4
  Top Layer w1.27: R3.1 69.7,18.7 5V.A
NetSH1_1: SH1.1 U1.60 | length 26.9
  Top Layer w0.254: SH1.1 27.661,53.899 27.661,41.656 30.328,38.989 34.595,38.989 35.85,37.734 U1.60
NetSH2_1: SH2.1 U1.53 | length 18.2
  Top Layer w0.254: U1.53 39.35,35.845 44.45,40.945 SH2.1
NRST: C20.2 NRST.01 R4.2 SW.2 U1.7 | length 38.6
  Top Layer w0.254: NRST.01 3.7,44.9 9.15,44.9 10.075,43.975 C20.2 10.05,41.575 R4.2 10.45,40.2 21.25,29.4 25.1,29.4 25.75,28.75 U1.7
PC14: Extra.01 U1.3 | length 28.2
  Top Layer w0.254: Extra.01 21.8,43.4 21.8,38.5 29.55,30.75 U1.3
PC15: Extra.02 U1.4 | length 26.8
  Top Layer w0.254: Extra.02 20.7,42.5 20.7,38.877 29.327,30.25 U1.4
PH0: Extra.03 U1.5 | length 26.7
  Top Layer w0.254: Extra.03 19.879,41.321 19.879,36.921 23.7,33.1 24.8,33.1 28.15,29.75 U1.5
PH1: Extra.04 U1.6 | length 25.9
  Top Layer w0.254: Extra.04@14.656,44.444 18.9,40.2 18.9,36 23.6,31.3 25.5,31.3 27.55,29.25 U1.6
PWR_WKUP2: U1.2 XBee.20 | length 8.9
  Top Layer w0.254: v1(29.8,31.3) 29.825,31.275 31.825,31.275 U1.2
  Bottom Layer w0.254: XBee.20 24.404,34.2 24.626,33.978 24.722,33.978 27.4,31.3 v1(29.8,31.3)
Servo1: Servo1.1 U1.24 | length 18.2
  Top Layer w0.254: Servo1.1 33.536,7.436 37.908,11.808 37.908,16.192 37.35,16.75 U1.24
Servo2: Servo2.1 U1.25 | length 15.1
  Top Layer w0.254: U1.25 37.85,17.15 38.3,16.7 38.3,7.6 Servo2.1
SPI1_MISO: SPI1.3 U1.22 | length 9.5
  Top Layer w0.254: SPI1.3 34.4,15 36.35,16.95 U1.22
SPI1_MOSI: SPI1.4 U1.23 | length 8.7
  Top Layer w0.254: U1.23 36.85,13.65 SPI1.4
SPI1_SCK: SPI1.2 U1.21 | length 10.3
  Top Layer w0.254: SPI1.2 35.85,17.55 U1.21
SPI3_MISO: IMU.10 IMU.15 J10.03 U1.56 | length 14
  Top Layer w0.254: U1.56 37.85,39.39 J10.03 38.56,40.16 39.184,40.784 39.184,43.395 ; IMU.10 38.683,43.567 39.012,43.567 39.184,43.395 ; IMU.15 38.683,46.067 39.012,46.067 39.184,45.895 39.184,43.395
SPI3_MOSI: IMU.9 J10.04 U1.57 | length 9.9
  Top Layer w0.254: U1.57 37.35,40.04 J10.04 38.635,41.445 IMU.9
SPI3_SCK: IMU.8 J10.02 U1.55 | length 9.6
  Top Layer w0.254: U1.55 38.35,37.95 39.765,39.365 39.765,40.035 J10.02 39.815,40.115 39.815,42.685 IMU.8
SWCLK: R2.2 SWD.2 U1.49 | length 32.7
  Top Layer w0.254: U1.49 41.35,34.55 44.773,37.973 49.873,37.973 SWD.2 61.6,49.905 65.045,53.35 R2.2
SWDIO: SWD.1 U1.46 | length 28.6
  Top Layer w0.254: U1.46 44.415,30.75 60.935,47.269 61.709,47.269 SWD.1
ToFINT1: ToF.5@61.1,25.25 U1.36 | length 19.2
  Top Layer w0.254: U1.36 44.55,25.75 46.1,27.3 59.05,27.3 ToF.5@61.1,25.25
ToFINT2: ToF.5@62.15,31.1 ToF.7 U1.39 | length 28.6
  Top Layer w0.254: U1.39 44.151,27.25 45.601,28.7 59.75,28.7 62.15,31.1 62.15,31.336 62.701,31.887 62.701,35.321 60.418,37.604 60.359,37.604 ToF.7
UART4_RX: U1.52 UART4.03 | length 21.6
  Top Layer w0.254: U1.52 39.85,35.532 45.3,40.982 45.3,45.725 UART4.03
UART4_TX: U1.51 UART4.02 | length 22.4
  Top Layer w0.254: U1.51 40.35,35.016 46.089,40.755 46.089,44.743 52.299,50.952 UART4.02
V11: C18.2 C19.2 U1.31 U1.62 | length 22.5
  Top Layer w0.254: C19.2 33.58,35.884 34.825,34.639 34.825,33.775 U1.62 34.85,31 40.85,25 U1.31 40.875,22.225 40.875,21.616 42.283,20.208 43.547,20.208 44,19.755 C18.2
XSHUT1: ToF.6@63.1,25.25 U1.37 | length 21.4
  Top Layer w0.254: U1.37 44.45,26.25 46,27.8 60.55,27.8 62.1,26.25 ToF.6@63.1,25.25
XSHUT2: ToF.5@58.463,37.9 ToF.6@64.69,31.1 U1.38 | length 35
  Top Layer w0.254: U1.38 44.289,26.75 45.739,28.2 61.79,28.2 64.69,31.1 64.69,34.132 60.002,38.82 58.883,38.82 58.463,38.4 ToF.5@58.463,37.9
pads on no net: IMU.04 IMU.05 IMU.12 IMU.13 J10.07 J10.08 SW.1 SW.3 ToF.8 U1.10 U1.11 U1.20 U1.26 U1.27 U1.40 U1.41 U1.42 U1.43 U1.44 U1.45 U1.50 XBee.4 XBee.5 XBee.6 XBee.7 XBee.8 XBee.9 XBee.11 XBee.12 XBee.13 XBee.14 XBee.15 XBee.16 XBee.17 XBee.18 XBee.19

## Polygon pours and split planes (outlines as drawn)
3V3 on Top Layer "NONET_L01_P035" (solid, shelved, pour order 35): 0.02,2.44 0.02,58.2 0.02,58.1 cw(c2.56,58.1) 2.56,60.64 70,60.64 cw(c70,58.1) 72.54,58.1 72.54,2.34 72.54,2.44 cw(c70,2.44) 70,-0.1 2.56,-0.1 cw(c2.56,2.44)
GND on Bottom Layer "NONET_L02_P036" (solid, shelved, pour order 36): 0.02,2.44 0.02,58.2 0.02,58.1 cw(c2.56,58.1) 2.56,60.64 70,60.64 cw(c70,58.1) 72.54,58.1 72.54,2.34 72.54,2.44 cw(c70,2.44) 70,-0.1 2.56,-0.1 cw(c2.56,2.44)

## Silkscreen, mask and mechanical layers (free items; w line width, h text height)
Top Overlay:
  drawing of 39 lines, arcs and shapes, not listed
  text "Droid" at 59.954,56.954 h1.52
  text "PC14" at 17.7,50.3 h0.4
  text "GND" at 26,50.3 h0.4
  text "PC15" at 17.7,48.3 h0.4
  text "SDA" at 26,48.3 h0.4
  text "GND" at 58.5,47.6 h0.4
  text "SWCLK" at 60.7,47.6 h0.4
  text "SWDIO" at 63.3,47.6 h0.4
  text "3V3" at 48.004,47.573 h0.4
  text "RX" at 50.214,47.573 h0.4
  text "TX" at 52.17,47.547 h0.4
  text "GND" at 54.059,47.551 h0.4
  text "PH0" at 17.7,46.3 h0.4
  text "SCL" at 26,46.3 h0.4
  text "3V3" at 26,44.3 h0.4
  text "PH1" at 17.7,44.2 h0.4
  text "Mumble Mumble" at 32.85,24.5 h0.5
  text "Wave Wave" at 32.85,23.75 h0.5
  text "3V3" at 52.4,21.5 h0.5
  text "GND" at 54.4,21.5 h0.5
  text "SCL" at 56.5,21.5 h0.5
  text "SDA" at 58.4,21.5 h0.5
  text "INT" at 60.5,21.5 h0.5
  text "SHUT" at 62.2,21.5 h0.5
  text "12V" at 55.2,14.55 h0.5
  text "GND" at 49.1,14.5 h0.5
  text "3V3" at 51.1,14.5 h0.5
  text "5V" at 53.4,14.5 h0.5
  text "Amy Lee, Cindy Yang, Gabe Warner, Grant Wang, Teja Koduru, Tenzin Sherab" at 72.106,9.727 h0.5 r90
  text "PWM" at 27.6,7.2 h0.5
  text "3V3" at 2.651,6.992 h0.5
  text "RX" at 4.951,6.992 h0.5
  text "TX" at 6.851,6.992 h0.5
  text "GND" at 8.651,6.992 h0.5
  text "5V" at 28.1,5.25 h0.5
  text "GND" at 27.6,3.25 h0.5
  text "M1" at 12.5,0.7 h0.5
  text "M2" at 14.9,0.7 h0.5
  text "M3" at 17.4,0.7 h0.5
  text "M4" at 19.9,0.7 h0.5
  text "GND" at 22.2,0.7 h0.5

## Dimensions
199.5,36.36 to 199.5,49.06 on Mechanical 16
209.66,36.36 to 189.34,36.36 on Mechanical 16
212.2,42.964 to 186.8,40.043 on Mechanical 16
200.008,33.82 to 199.119,51.6 on Mechanical 16